# Allegro board AVRUSB500_0.brd
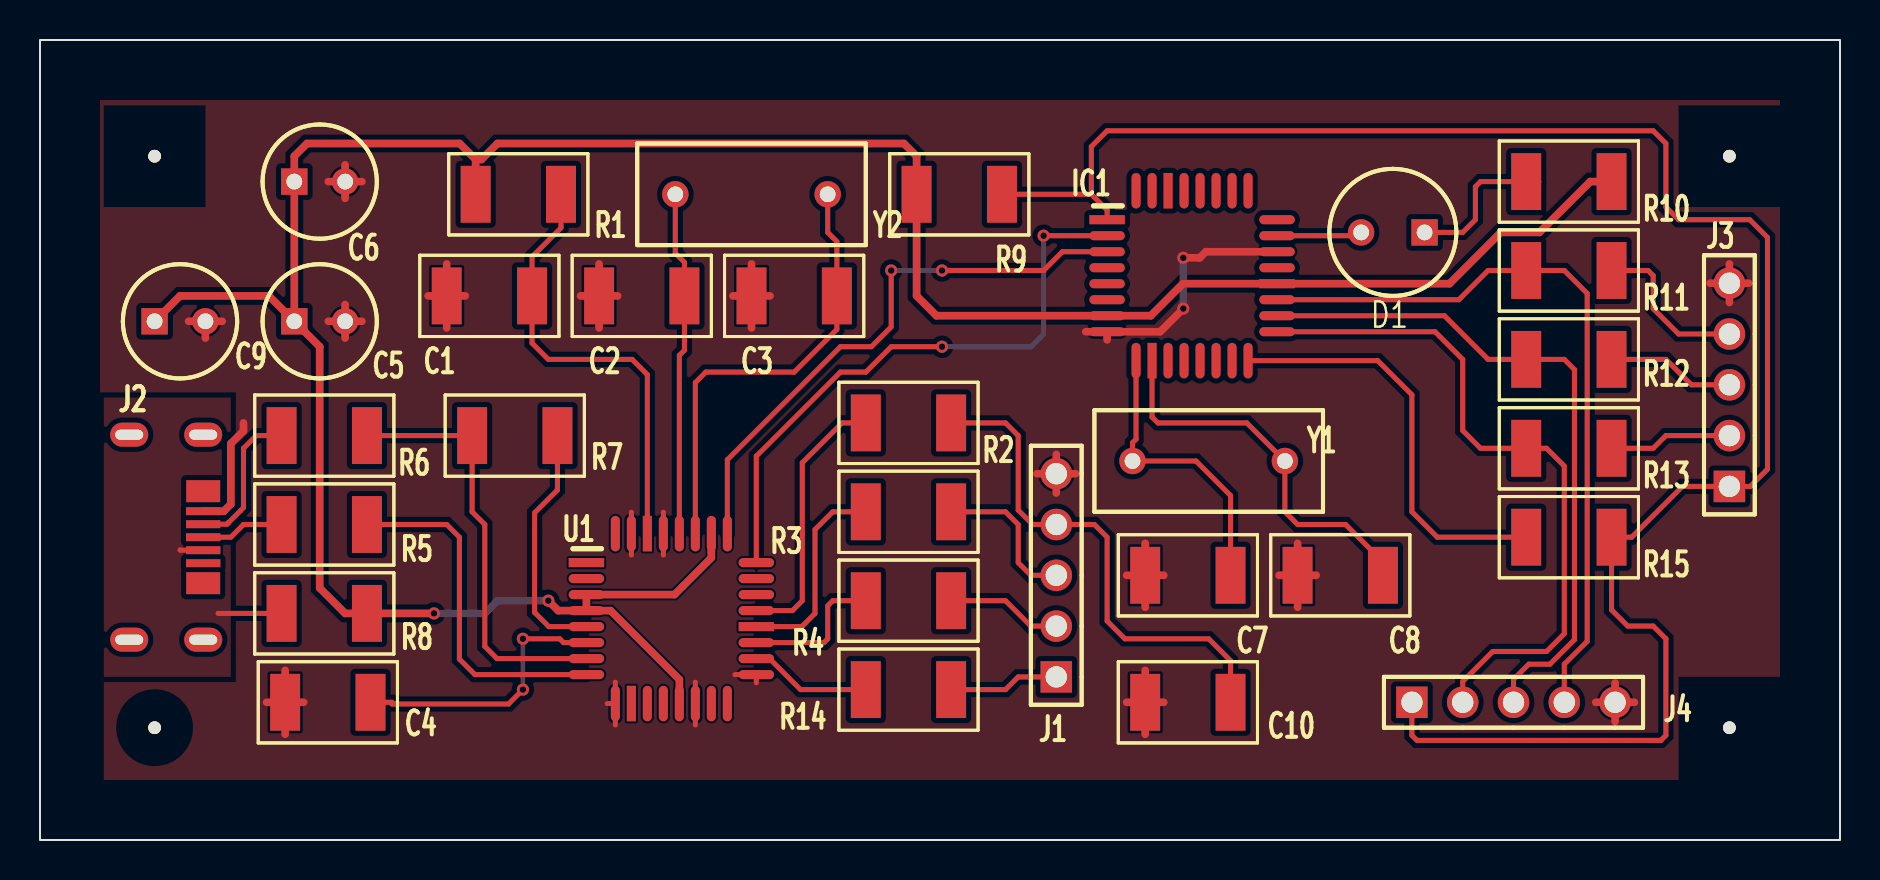
[diagram p0: board, top side]
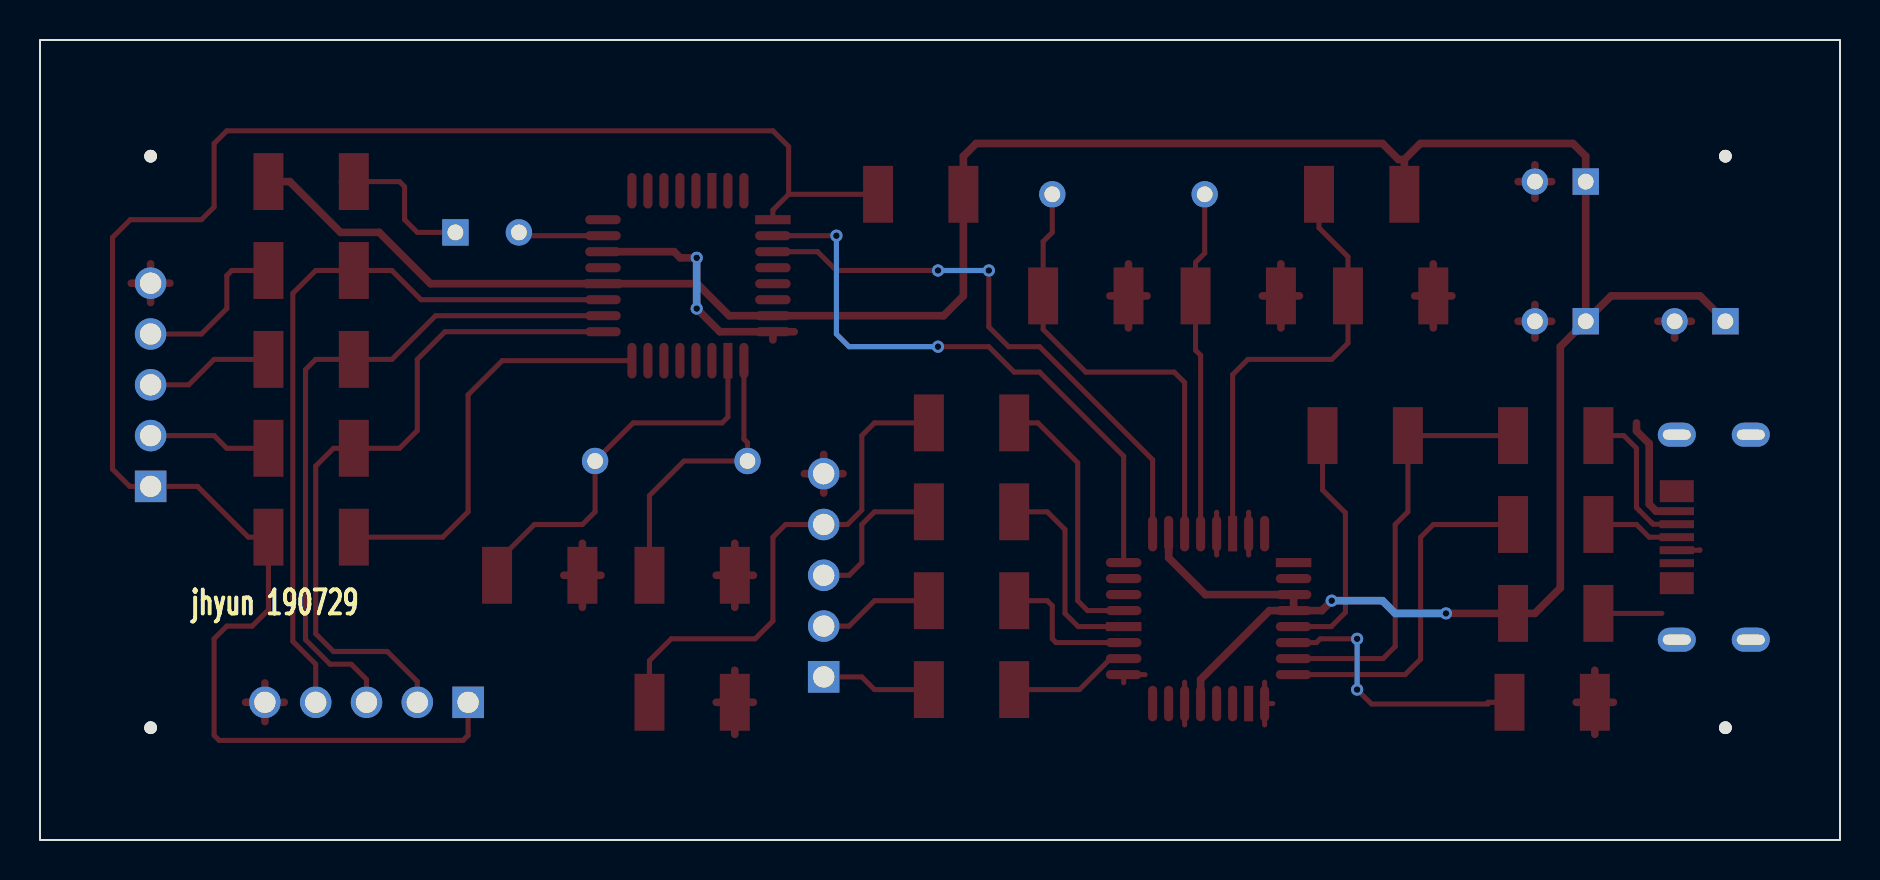
[diagram p1: board, bottom side, seen from below]

Outline 90 x 40 mm; copper layers: TOP, BOTTOM. Coordinates in mm from the lower left corner of the outline.
Outline path: rectangle 0,0 90,40

## Design rules (mm)
constraint set DEFAULT: min track width 0.254
net group POWERNETS: nets VCC

## Placement (name value [footprint] x y rotation side)
C1  47nF  [CPCYL1D225LS100031]  20.34 27.2 0 top
C2  27pF  [CPCYL1D225LS100031]  27.95 27.2 0 top
C3  27pF  [CPCYL1D225LS100031]  35.57 27.2 0 top
C4  47nF  [CPCYL1D225LS100031]  16.52 6.89 180 top
C5  100nF  [CPCYL1D225LS100031#2]  12.71 25.94 0 top
C6  1uF  [CPCYL1D225LS100031#2]  12.71 32.92 0 top
C7  100nF  [CPCYL1D225LS100031]  55.26 13.23 0 top
C8  100nF  [CPCYL1D225LS100031]  62.88 13.23 0 top
C9  100nF  [CPCYL1D225LS100031#2]  5.73 25.94 0 top
C10  22nF  [CPCYL1D225LS100031]  55.26 6.89 0 top
D1  LED  [CYLD250LS125031]  69.23 30.38 180 top
IC1  ATmega8  [QUAD80M32WG900]  53.35 31.02 270 top
J1  bbpg_Bitbang  [BLKCON100VHTM1SQSW1005]  50.81 8.16 90 top
J2  USBA  [MICRO_USB]  4.46 15.14 270 top
J3  avrusb500_out  [BLKCON100VHTM1SQSW1005]  84.47 17.68 90 top
J4  firmware_in  [BLKCON100VHTM1SQSW1005]  68.59 6.89 0 top
NOREF  -  []  0 40 0 top
NOREF#2  -  [unnamed#2]  84.47 5.62 0 top
NOREF#3  -  [unnamed#2]  5.73 5.62 0 top
NOREF#4  -  [unnamed#2]  5.73 34.19 0 top
NOREF#5  -  []  90 0 90 top
NOREF#6  -  [unnamed#2]  84.47 34.19 0 top
R1  470  [AX400X100031]  26.05 32.28 180 top
R2  220  [AX400X100031]  41.29 20.86 0 top
R3  220  [AX400X100031]  41.29 16.41 0 top
R4  220  [AX400X100031]  41.29 11.96 0 top
R5  27  [AX400X100031]  12.08 15.77 0 top
R6  27  [AX400X100031]  12.08 20.22 0 top
R7  1.5k  [AX400X100031]  21.6 20.22 0 top
R8  2.2  [AX400X100031]  12.08 11.33 0 top
R9  10k  [AX400X100031]  43.83 32.28 0 top
R10  470  [AX400X100031]  74.31 32.92 0 top
R11  1k  [AX400X100031]  74.31 28.48 0 top
R12  220  [AX400X100031]  74.31 24.03 0 top
R13  1k  [AX400X100031]  74.31 19.59 0 top
R14  220  [AX400X100031]  41.29 7.52 0 top
R15  220  [AX400X100031]  74.31 15.14 0 top
U1  FT232BM  [QUAD80M32WG900]  27.32 13.87 270 top
Y1  3.6864Mhz  [RAD450X200LS300031]  62.24 18.95 180 top
Y2  6Mhz  [RAD450X200LS300031]  31.76 32.28 0 top

## Library data of the parts
C1-C4 C7 C8 C10 = CAPACITOR NON-POL: alternate symbols: (SML2015)
C5 C9 = CAPACITOR NON-POL: alternate symbols: (SMDCAP)
C6 = CAPACITOR POL: alternate symbols: (SMDCAP)
D1 = LED
IC1 = ATmega8-DIL28_1
J1 J3 J4 = CON5
J2 = CON4_7
R1-R15 = R: alternate symbols: (SML2015)
U1 = FT232BM_2: alternate symbols: (JEDECMS026)
Y1 Y2 = ZTA

## Footprints (pads in the part's own frame, mm; a bottom-side part is the same pattern mirrored in y, then rotated)
AX400X100031
  rect 1.499x2.845 smd: 1(0,0) 2(4.267,0)
BLKCON100VHTM1SQSW1005
  rect 1.575x1.575 hole 1.067: 1(0,0)
  round 1.575 hole 1.067: 2(2.54,0) 3(5.08,0) 4(7.62,0) 5(10.16,0)
CPCYL1D225LS100031
  rect 1.499x2.845 smd: 1(0,0) 2(4.267,0)
CPCYL1D225LS100031#2
  rect 1.321x1.321 hole 0.787: 1(0,0)
  round 1.321 hole 0.787: 2(2.54,0)
CYLD250LS125031
  rect 1.321x1.321 hole 0.787: 1(0,0)
  round 1.321 hole 0.787: 2(3.175,0)
MICRO_USB
  oval 1.2x1.9 hole 0.5x1.4: (-5.125,3.7) (-5.125,0) (5.125,3.7) (5.125,0)
  rect 1.1x1.7 smd: (-2.3,3.7) (2.3,3.7)
  rect 0.4x1.72 smd: 1(-1.3,3.7) 2(-0.65,3.7) 3(0,3.7) 4(0.65,3.7) 5(1.3,3.7)
QUAD80M32WG900
  rect 0.457x1.778 smd: 1(0,0) 20(3.2,8.496)
  oval 0.457x1.778 smd: 2(0.8,0) 3(1.6,0) 4(2.4,0) 5(3.2,0) 6(4,0) 7(4.801,0) 8(5.601,0) 17(5.601,8.496) 18(4.801,8.496) 19(4,8.496) 21(2.4,8.496) 22(1.6,8.496) 23(0.8,8.496) 24(0,8.496)
  oval 1.778x0.457 smd: 9(7.048,1.448) 11(7.048,3.048) 12(7.048,3.848) 13(7.048,4.648) 14(7.048,5.448) 15(7.048,6.248) 16(7.048,7.048) 25(-1.448,7.048) 26(-1.448,6.248) 27(-1.448,5.448) 28(-1.448,4.648) 29(-1.448,3.848) 31(-1.448,2.248) 32(-1.448,1.448)
  rect 1.778x0.457 smd: 10(7.048,2.248) 30(-1.448,3.048)
RAD450X200LS300031
  round 1.321 hole 0.787: 1(0,0) 2(7.62,0)
unnamed#2
  round 0.635 hole 3.175 unplated: (0,0)

## Nets
+5V: J2.4 R8.1
GND: C1.1 C2.1 C3.1 C4.2 C5.2 C6.2 C7.1 C8.1 C9.2 C10.1 IC1.8 IC1.22 J1.5 J2.1 J3.5 J4.5 U1.9 U1.14 U1.17 U1.29 U1.31
VCC: C5.1 C6.1 C9.1 IC1.7(VCC) IC1.20 R1.2 R8.2 R9.1 R10.2 U1.3 U1.4 U1.13 U1.26
BMISO: J1.3 R3.2
BMOSI: J1.2 R4.2
BRESET: J1.1 R14.2
BSCK: C10.2 J1.4 R2.2
D+: J2.2 R6.1
D-: J2.3 R5.1
F_MISO: IC1.18 J4.3 R12.1
F_MOSI: IC1.17 J4.2 R13.1
F_SCK: IC1.19 J4.4 R11.1
MISO: J3.3 R12.2
MOSI: J3.2 R13.2
RESET: IC1.1 J3.1 J4.1 R9.2 R15.2
RXD: IC1.2 U1.24
SCK: J3.4 R11.2
TXD: IC1.3 U1.25
N02483: R6.2 R7.1 U1.7
N02615: R5.2 U1.8
N03527: C4.1 U1.6
N06839: R2.1 U1.21
N06967: R3.1 U1.20
N07033: R4.1 U1.19
N07247: R14.1 U1.18
N11951: R7.2 U1.5
N15182: C7.2 IC1.9 Y1.2
N15289: C8.2 IC1.10 Y1.1
N19734: D1.2(CATHODE) IC1.23
N20572: D1.1 R10.1
N22544: IC1.16 R15.1
N41098: C3.2 U1.27 Y2.2
N41106: C2.2 U1.28(XTOUT) Y2.1
N49165: C1.2 R1.1 U1.30

Pads without a net: IC1 4 5 6 11 12 13 14 15 21 24 25 26 27 28 29 30 31 32; J2 5; U1 1 2 10 11 12 15 16 22 23 32

## Via types
v1: diameter 0.61, hole 0.33, TOP to BOTTOM, 10 vias

## Routing (per net, layer and track width the routed paths; a pad name or vN(x,y) marks a point on that pad's centre or on a via; arc(x,y) is an arc through that point)
+5V: length 4.3
  TOP w0.254: 7,14.5 7.01,14.49 J2.4 ; R8.1 8.9,11.33
GND: length 85.6
  TOP w0.254: 28.36,6.82 U1.9 ; U1.9 28.77,5.76 ; U1.9 28.77,7.89 ; 31.17,14.25 U1.29 31.17,16.39 ; 32.77,5.76 U1.14 32.77,7.89 ; 35.82,7.86 35.82,8.27 34.75,8.27 ; 29.57,14.25 U1.31 29.57,16.39
  TOP w0.381: 54.33,13.23 C7.1 ; C7.1 55.26,11.63 ; C7.1 56.19,13.23 ; C7.1 55.26,14.84 ; 61.95,13.23 C8.1 ; C8.1 62.88,11.63 ; C8.1 63.81,13.23 ; C8.1 62.88,14.84 ; 83.5,27.84 J3.5 ; J3.5 84.47,28.81 ; J3.5 84.47,26.87 ; J3.5 85.44,27.84 ; J4.5 78.75,7.85 ; J4.5 78.75,5.92 ; J4.5 79.72,6.89 ; J4.5 77.79,6.89 ; 50.81,17.35 J1.5 ; J1.5 49.85,18.32 ; J1.5 50.81,19.28 ; J1.5 51.78,18.32 ; C1.1 21.26,27.2 ; C1.1 20.34,28.81 ; C1.1 20.34,25.6 ; C1.1 19.41,27.2 ; C4.2 13.19,6.89 ; C4.2 12.26,8.49 ; C4.2 12.26,5.28 ; C4.2 11.33,6.89 ; 55.26,5.28 C10.1 ; C10.1 56.19,6.89 ; C10.1 55.26,8.49 ; C10.1 54.33,6.89 ; C9.2 9.11,25.94 ; C9.2 7.43,25.94 ; C9.2 8.27,25.1 ; C3.1 35.57,28.81 ; C3.1 35.57,25.6 ; C3.1 36.5,27.2 ; C3.1 34.65,27.2 ; 52.29,25.41 IC1.8 ; IC1.8 56.01,25.41 v1(57.16,26.57) ; IC1.8 53.35,25.01 ; C2.1 27.95,28.81 ; C2.1 28.88,27.2 ; C2.1 27.95,25.6 ; C2.1 27.03,27.2 ; IC1.22 58.3,29.41 57.99,29.11 v1(57.16,29.11) ; C5.2 15.25,26.77 ; C5.2 16.09,25.94 ; C5.2 15.25,25.1 ; C5.2 14.42,25.94 ; 15.25,32.08 C6.2 ; C6.2 14.42,32.92 ; C6.2 16.09,32.92 ; C6.2 15.25,33.76
  TOP w0.382: 10.17,20.86 10.17,20.45 9.54,19.82 9.54,16.79 9.19,16.44 J2.1
  BOTTOM w0.381: v1(57.16,26.57) v1(57.16,29.11)
VCC: length 139.7
  TOP w0.382: U1.4 28.53,11.47 31.97,8.03 U1.13 ; U1.4 U1.3 31.73,12.27 33.57,14.11 U1.26 ; U1.4 25.91,11.47 v1(25.41,11.96) ; C9.1 7,27.2 11.45,27.2 C5.1 ; 21.78,34.02 22.07,34.02 22.88,34.83 43.2,34.83 43.83,34.19 R9.1 43.83,27.2 44.82,26.21 IC1.7 55.54,26.21 57.14,27.81 IC1.20 70.47,27.81 73.04,30.38 74.97,30.38 77.51,32.92 R10.2 ; 21.78,34.02 21.78,32.28 ; 21.78,34.02 20.98,34.83 13.35,34.83 12.71,34.19 C6.1 C5.1 ; C5.1 13.98,24.66 13.98,12.6 15.26,11.33 R8.2 v1(19.7,11.33)
  BOTTOM w0.381: v1(25.41,11.96) 22.88,11.96 22.24,11.33 v1(19.7,11.33)
BMISO: length 7.7
  TOP w0.254: J1.3 49.55,13.23 48.91,13.87 48.91,15.77 48.27,16.41 R3.2
BMOSI: length 5.8
  TOP w0.254: J1.2 49.55,10.7 48.27,11.96 R4.2
BRESET: length 5.5
  TOP w0.254: R14.2 48.27,7.52 48.91,8.16 J1.1
BSCK: length 25.6
  TOP w0.254: C10.2 59.53,8.97 58.44,10.06 54.24,10.06 53.35,10.95 53.35,15.14 52.72,15.77 J1.4 49.63,15.77 48.91,16.49 48.91,20.22 48.27,20.86 R2.2
D+: length 7.5
  TOP w0.254: R6.1 10.81,20.22 10.17,19.59 10.17,16.62 10.03,16.47 10.03,16.47 9.43,15.87 9.43,15.87 9.35,15.79 J2.2
D-: length 4.2
  TOP w0.254: J2.3 9.54,15.14 10.17,15.77 R5.1
F_MISO: length 34.5
  TOP w0.254: IC1.18 70.22,26.21 72.41,24.03 R12.1 76.22,24.03 76.72,23.52 76.72,10.02 75.5,8.79 74.44,8.79 73.67,8.03 J4.3
F_MOSI: length 34.7
  TOP w0.254: J4.2 71.13,7.93 72.63,9.43 75.33,9.43 76.22,10.31 76.22,18.7 75.33,19.59 R13.1 72.02,19.59 71.13,20.47 71.13,24.03 69.75,25.41 IC1.17
F_SCK: length 37.5
  TOP w0.254: J4.4 76.22,8.79 77.36,9.93 77.36,27.33 76.22,28.48 R11.1 72.4,28.48 70.94,27.02 IC1.19
MISO: length 6.4
  TOP w0.254: J3.3 82.56,22.76 81.3,24.03 R12.2
MOSI: length 6.2
  TOP w0.254: R13.2 80.66,19.59 81.3,20.22 J3.2
RESET: length 93.8
  TOP w0.254: 52.57,32.28 52.57,34.67 53.35,35.46 80.66,35.46 81.3,34.83 81.3,31.65 81.93,31.02 85.49,31.02 86.38,30.13 86.38,18.54 85.51,17.68 J3.1 82.12,17.68 79.58,15.14 R15.2 78.58,11.51 79.39,10.7 80.66,10.7 81.3,10.06 81.3,5.23 81.04,4.98 68.85,4.98 68.59,5.23 J4.1 ; 52.57,32.28 R9.2 ; 52.57,32.28 53.35,31.5 IC1.1
RXD: length 30.3
  TOP w0.254: U1.24 35.82,19.19 40.02,23.39 41.29,23.39 42.56,24.66 v1(45.1,24.66) ; v1(50.18,30.21) IC1.2
  BOTTOM w0.254: v1(45.1,24.66) 49.55,24.66 50.18,25.3 v1(50.18,30.21)
SCK: length 8.2
  TOP w0.254: R11.2 80.41,28.48 80.66,28.22 80.66,26.57 81.93,25.3 J3.4
TXD: length 28.6
  TOP w0.254: IC1.3 51.12,29.41 50.18,28.48 v1(45.1,28.48) ; v1(42.56,28.48) 42.56,25.66 41.57,24.66 40.02,24.66 34.37,19.01 U1.25
  BOTTOM w0.254: v1(42.56,28.48) v1(45.1,28.48)
N02483: length 21.4
  TOP w0.254: 27.32,9.07 22.85,9.07 22.24,9.68 22.24,15.77 21.6,16.41 R7.1 R6.2
N02615: length 17.7
  TOP w0.254: R5.2 20.34,15.77 20.97,15.14 20.97,9.04 21.74,8.27 27.32,8.27
N03527: length 13.8
  TOP w0.254: v1(24.14,10.06) 25.99,10.06 26.18,9.87 U1.6 ; C4.1 17.6,6.89 17.6,6.8 23.42,6.8 v1(24.14,7.52)
  BOTTOM w0.254: v1(24.14,7.52) v1(24.14,10.06)
N06839: length 13.4
  TOP w0.254: R2.1 40.1,20.86 38.11,18.87 38.11,11.96 37.62,11.47 U1.21
N06967: length 10.3
  TOP w0.254: R3.1 39.64,16.41 38.75,15.52 38.75,11.33 38.09,10.67 U1.20
N07033: length 7.3
  TOP w0.254: U1.19 39.2,9.87 39.38,10.06 39.38,11.71 39.64,11.96 R4.1
N07247: length 6.1
  TOP w0.254: 35.82,9.07 36.48,9.07 38.03,7.52 R14.1
N11951: length 12.2
  TOP w0.254: U1.5 25.44,10.67 24.73,11.38 24.73,16.36 25.87,17.5 R7.2
N15182: length 14.7
  TOP w0.254: 54.8,23.97 54.8,20.04 54.62,19.86 Y1.2 57.8,18.95 59.53,17.22 C7.2
N15289: length 19.5
  TOP w0.254: C8.2 67.15,13.91 65.28,15.77 62.88,15.77 62.24,16.41 Y1.1 60.34,20.86 55.89,20.86 55.6,21.15 55.6,23.97
N19734: length 4.3
  TOP w0.254: D1.2 65.89,30.21 IC1.23
N20572: length 7.7
  TOP w0.254: D1.1 71.13,30.38 71.77,31.02 71.77,32.67 72.02,32.92 R10.1 74.94,32.92
N22544: length 21.1
  TOP w0.254: 74.44,15.14 R15.1 69.87,15.14 68.59,16.41 68.59,22.26 66.89,23.97 60.4,23.97
N41098: length 22.7
  TOP w0.254: U1.27 32.77,22.87 33.29,23.39 37.71,23.39 39.84,25.53 C3.2 39.84,29.92 39.38,30.38 Y2.2
N41106: length 17.3
  TOP w0.254: Y2.1 31.76,29.34 32.22,28.88 C2.2 32.22,24.49 31.97,24.23 U1.28
N49165: length 22.4
  TOP w0.254: R1.1 26.05,30.61 24.6,29.16 C1.2 24.6,24.84 25.41,24.03 29.61,24.03 30.37,23.27 U1.30

## Copper pours and planes (outline as drawn; the poured copper is in the pictures)
+5V on TOP: 3.19,22.12 3.19,8.16 9.54,8.16 9.54,22.12
GND on TOP: 3,3 3,37 87,37 87,3 ; 6 cut-outs

## Text on the board
Ref Des/Silkscreen Bottom: jhyun 190729
DIMENSION: FIGURE | FINISHED_SIZE | 0.33 | 0.7869 | 1.0671 | 1.4x0.5001 | DRILL CHART: TOP to BOTTOM | ALL UNITS ARE IN MILLIMETERS | PLATED | QTY | 8 | 12 | 15 | 4
